# EAGLE board untitled - auto (EAGLE 7.2.0)
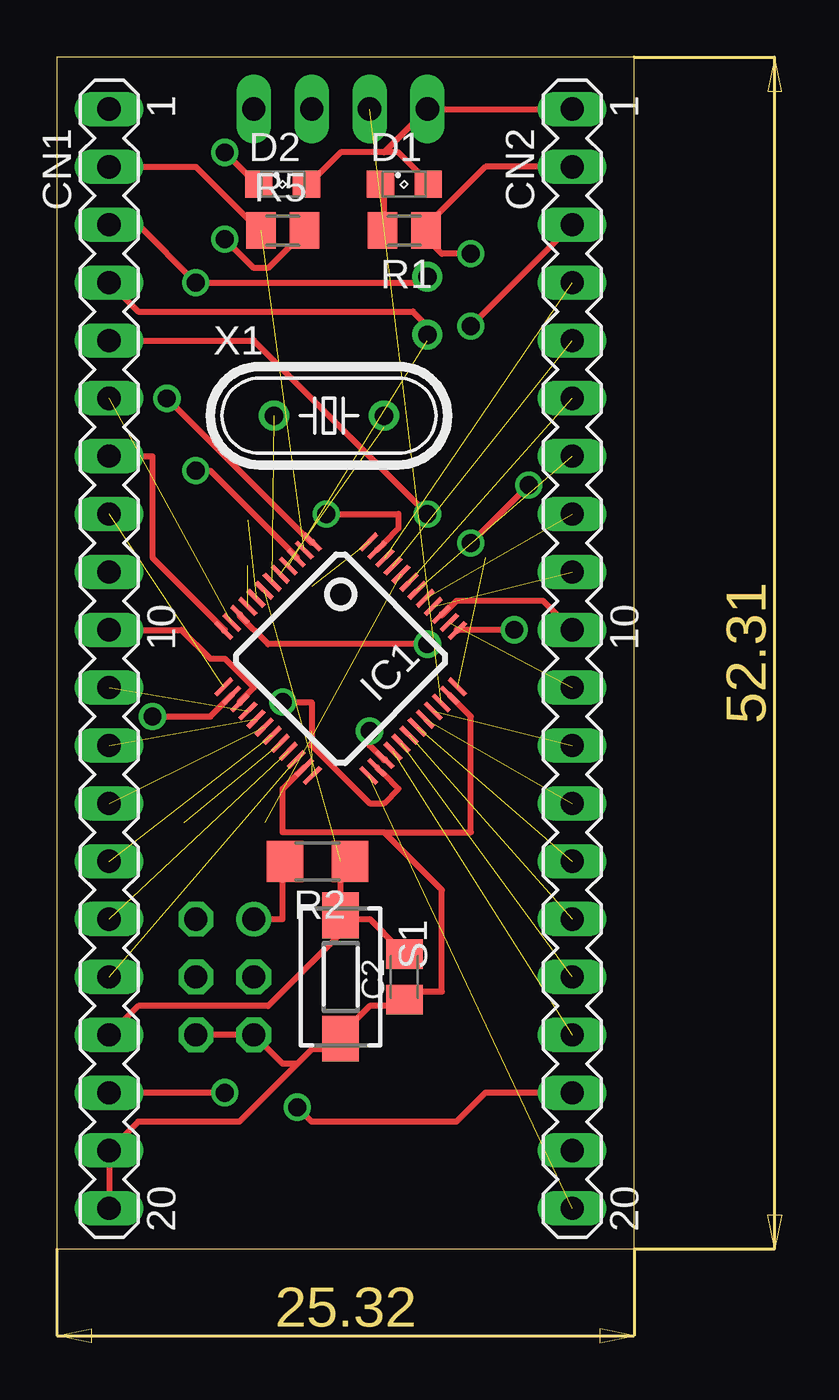
[diagram p0: board, top side]
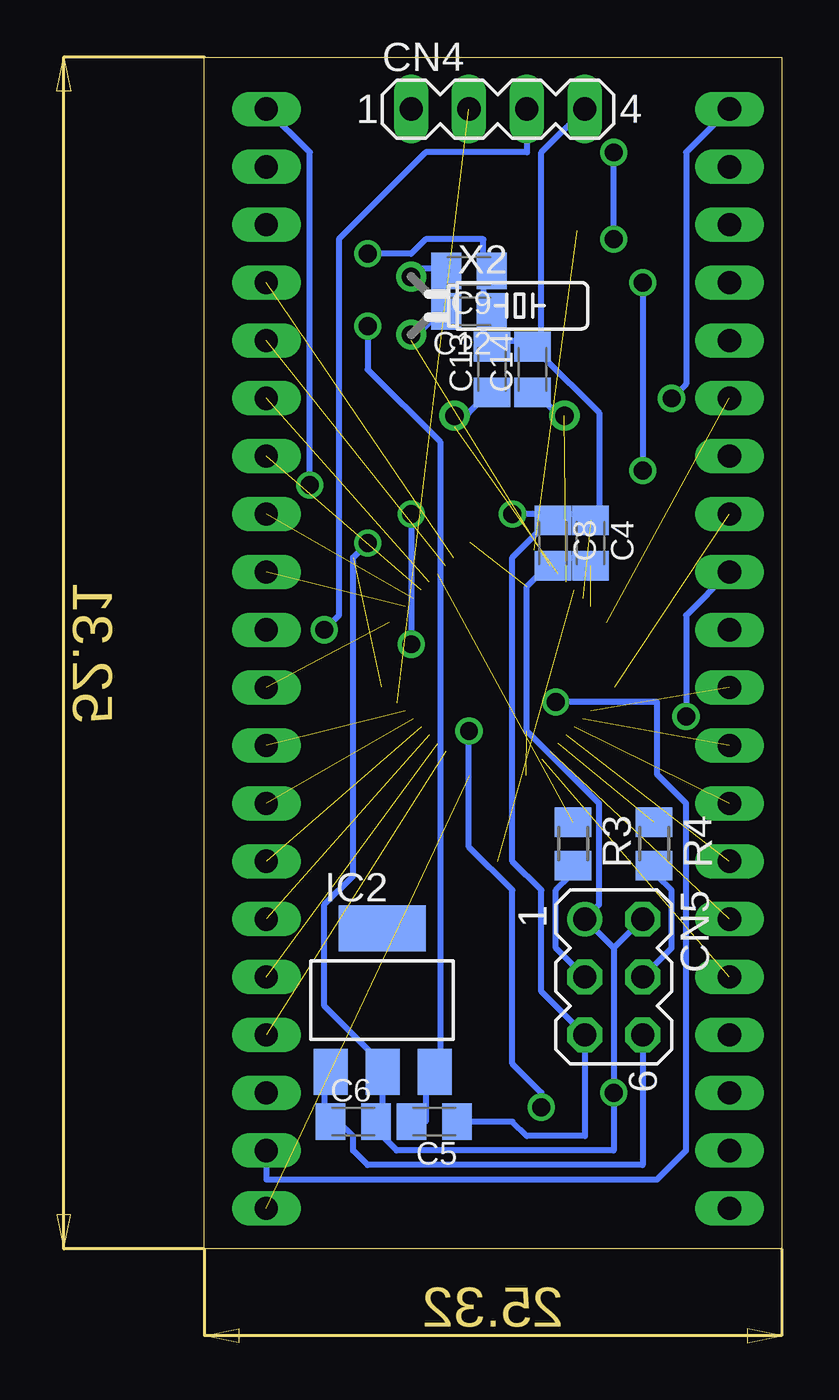
[diagram p1: board, bottom side, seen from below]

Size 25.32 x 52.31 mm. Coordinates in mm from the lower left corner, seen from the top.
Outline: 0,0 25.32,0 25.32,52.31 0,52.31 0,0
Copper layers (1*16): Top 0.035mm / dielectric 1.5mm / Bottom 0.035mm
Design rules "default *": minimum track width 10mil, minimum drill 31mil, track to track 8mil, track to pad 8mil, pad to pad 8mil, via to via 8mil, smd to smd 8mil, copper to edge 40mil, drill to drill 8mil, minimum pad ring 10mil, minimum via ring 8mil, stop-mask expansion 4mil, vias tented up to drill 0mil, thermal gap 10mil

## Footprints (pad centres in the part's own frame; a part is rotated, then mirrored left to right if it is on the bottom)
C0805K = smd 1.3 x 1.6: 1 -1,0; 2 1,0
MA20-1L = drill 1.016 long: 1 24.13,0; 2 21.59,0; 3 19.05,0; 4 16.51,0; 5 13.97,0; 6 11.43,0; 7 8.89,0; 8 6.35,0; 9 3.81,0; 10 1.27,0; 11 -1.27,0; 12 -3.81,0; 13 -6.35,0; 14 -8.89,0; 15 -11.43,0; 16 -13.97,0; 17 -16.51,0; 18 -19.05,0; 19 -21.59,0; 20 -24.13,0
MA04-1 = drill 1.016 long: 1 -3.81,0; 2 -1.27,0; 3 1.27,0; 4 3.81,0
MA03-2 = drill 1.016: 1 -2.54,-1.27 | drill 1.016 octagon: 2 -2.54,1.27; 3 0,-1.27; 4 0,1.27; 5 2.54,-1.27; 6 2.54,1.27
SML0805 = smd 1.2 x 1.2: A 1.05,0; C -1.05,0
TQFP48 = smd 0.2 x 1: 1 -2.75,-4.5; 2 -2.25,-4.5; 3 -1.75,-4.5; 4 -1.25,-4.5; 5 -0.75,-4.5; 6 -0.25,-4.5; 7 0.25,-4.5; 8 0.75,-4.5; 9 1.25,-4.5; 10 1.75,-4.5; 11 2.25,-4.5; 12 2.75,-4.5; 25 2.75,4.5; 26 2.25,4.5; 27 1.75,4.5; 28 1.25,4.5; 29 0.75,4.5; 30 0.25,4.5; 31 -0.25,4.5; 32 -0.75,4.5; 33 -1.25,4.5; 34 -1.75,4.5; 35 -2.25,4.5; 36 -2.75,4.5 | smd 1 x 0.2: 13 4.5,-2.75; 14 4.5,-2.25; 15 4.5,-1.75; 16 4.5,-1.25; 17 4.5,-0.75; 18 4.5,-0.25; 19 4.5,0.25; 20 4.5,0.75; 21 4.5,1.25; 22 4.5,1.75; 23 4.5,2.25; 24 4.5,2.75; 37 -4.5,2.75; 38 -4.5,2.25; 39 -4.5,1.75; 40 -4.5,1.25; 41 -4.5,0.75; 42 -4.5,0.25; 43 -4.5,-0.25; 44 -4.5,-0.75; 45 -4.5,-1.25; 46 -4.5,-1.75; 47 -4.5,-2.25; 48 -4.5,-2.75
SOT223 = smd 1.499 x 2.007: 1 -2.261,-3.15; 2 0.025,-3.15; 3 2.311,-3.15 | smd 3.81 x 2.007: 4 0,3.15
M0805 = smd 1.3 x 1.6: 1 -0.95,0; 2 0.95,0
R1206 = smd 1.6 x 1.803: 1 -1.422,0; 2 1.422,0
DTSM-3 = smd 2 x 1.6: 1 -2.7,0; 2 2.7,0
HC49/S = drill 0.813: 1 -2.413,0; 2 2.413,0
TC26H = drill 0.813: 1 -1.27,0; 2 1.27,0

## Placement (x,y rotation side)
C2  100n  [C0805K]  15.24,11.94 90 top
C4  100n  [C0805K]  8.38,30.99 270 bottom
C5  10u  [C0805K]  15.24,5.59 180 bottom
C6  10u  [C0805K]  18.8,5.59 0 bottom
C8  100n  [C0805K]  10.03,30.99 270 bottom
C9  100p  [C0805K]  13.72,42.93 180 bottom
C12  100p  [C0805K]  13.72,41.15 180 bottom
C13  12p  [C0805K]  12.7,38.61 90 bottom
C14  12p  [C0805K]  10.92,38.61 90 bottom
CN1  [MA20-1L]  2.29,25.91 90 top
CN2  [MA20-1L]  22.61,25.91 90 top
CN4  [MA04-1]  12.45,50.04 0 bottom
CN5  [MA03-2]  7.37,11.94 270 bottom
D1  red  [SML0805]  15.24,46.74 0 top
D2  blue  [SML0805]  9.91,46.74 0 top
IC1  STM32F10XCXT6  [TQFP48]  12.45,25.91 225 top
IC2  REG1117  [SOT223]  17.53,10.92 0 bottom
R1  510  [M0805]  15.24,44.7 180 top
R2  10k  [R1206]  11.43,17.02 180 top
R3  100k  [M0805]  9.14,17.78 270 bottom
R4  100k  [M0805]  5.59,17.78 270 bottom
R5  510  [M0805]  9.91,44.7 0 top
S1  DTSM-3  [DTSM-3]  12.45,11.94 270 top
X1  8M  [HC49/S]  11.94,36.58 0 top
X2  32k768  [TC26H]  16.26,41.4 270 bottom

## Library data of the parts
C2 C4-C6 C8 C9 C12-C14 R1-R5 = resistor
CN1 CN2 CN4 CN5 = con-lstb; OC_FARNELL: unknown; OC_NEWARK: unknown
D1 D2 = led
IC1 = stm32
IC2 = burr-brown; MPN: REG1117; OC_FARNELL: 1097566; OC_NEWARK: 14P6981
S1 = switch-tact
X1 = crystal; OC_FARNELL: 1667008; OC_NEWARK: unknown
X2 = crystal; OC_FARNELL: unknown; OC_NEWARK: unknown

## Nets
3VB: CN1.1 IC1.1
+3V3: C4.2 C6.2 C8.2 CN1.18 CN2.1 CN4.1 CN5.1 CN5.2 D1.A D2.A IC1.9 IC1.24 IC1.36 IC1.48 IC2.2 R2.2
+5V: C5.2 CN2.3 IC2.3
A0: CN1.5 IC1.10
A1: CN1.6 IC1.11
A2: CN1.7 IC1.12
A3: CN1.8 IC1.13
A4: CN1.9 IC1.14
A5: CN1.10 IC1.15
A6: CN1.11 IC1.16
A7: CN1.12 IC1.17
A8: CN2.16 IC1.29
A9: CN2.15 IC1.30
A10: CN2.14 IC1.31
A11: CN2.13 IC1.32
A12: CN2.12 IC1.33
A15: CN2.11 IC1.38
B0: CN1.13 IC1.18
B1: CN1.14 IC1.19
B3: CN2.10 IC1.39
B4: CN2.9 IC1.40
B5: CN2.8 IC1.41
B6: CN2.7 IC1.42
B7: CN2.6 IC1.43
B8: CN2.5 IC1.45
B9: CN2.4 IC1.46
B10: CN1.15 IC1.21
B11: CN1.16 IC1.22
B12: CN2.20 IC1.25
B13: CN2.19 IC1.26
B14: CN2.18 IC1.27
B15: CN2.17 IC1.28
BOOT0: CN5.3 R3.2
BOOT1: CN5.4 R4.2
C13: CN1.2 IC1.2 R5.1
C14: C9.2 CN1.3 IC1.3 X2.1
C15: C12.2 CN1.4 IC1.4 X2.2
DCLK: CN4.3 IC1.37
DIO: CN4.2 IC1.34
GND: C2.1 C4.1 C5.1 C6.1 C8.1 C9.1 C12.1 C13.2 C14.2 CN1.19 CN1.20 CN2.2 CN4.4 CN5.5 CN5.6 IC1.8 IC1.23 IC1.35 IC1.47 IC2.1 R1.1 S1.2
N$1: C13.1 IC1.5 X1.2
N$2: C14.1 IC1.6 X1.1
N$3: IC1.44 R3.1
N$4: IC1.20 R4.1
N$5: D1.C R1.2
N$6: D2.C R5.2
R: C2.2 CN1.17 IC1.7 R2.1 S1.1

## Tracks (layer width: path | path; a pad name or v marks a point on that pad's centre or on a via)
3VB  (via drill 0.79)
  Top 0.254: v4.83,37.34 11.18,30.99 IC1.1
  Bottom 0.254: v4.83,37.34 4.19,37.97 4.19,48.13 CN1.1
+3V3  (via drill 0.79)  (4 unrouted)
  Top 0.254: CN5.1 9.91,14.48 9.91,17.02 R2.2 | 14.35,48.13 14.99,48.13 16.26,46.86 D1.A | 14.35,48.13 12.45,48.13 11.18,46.86 D2.A | 14.35,48.13 CN4.1 CN2.1 | v7.37,6.86 CN1.18 | v18.16,30.99 v20.7,33.53
  Bottom 0.254: C4.2 8.64,30.35 9.91,30.35 C8.2 10.54,29.72 11.18,29.08 11.18,22.73 8,19.56 8,15.11 CN5.1 7.37,13.21 | 17.53,5.59 17.53,7.49 IC2.2 17.53,8.13 20.07,10.67 20.07,15.11 18.8,16.38 18.8,30.35 v18.16,30.99 | 17.53,5.59 17.53,4.95 16.89,4.32 7.37,4.32 v7.37,6.86 7.37,13.21 | CN5.2 7.37,13.21 | 17.53,5.59 C6.2 | CN2.1 20.7,48.13 v20.7,33.53
+5V  (via drill 0.79)
  Top 0.254: CN2.3 v18.16,40.51
  Bottom 0.254: C5.2 15.62,5.59 15.62,7.49 IC2.3 14.99,8.13 14.99,35.43 18.16,38.61 v18.16,40.51
A0  (via drill 0.79)
  Top 0.254: v16.26,26.54 9.27,26.54 8,27.81 IC1.10 | v16.26,32.26 8.64,39.88 CN1.5
  Bottom 0.254: v16.26,32.26 v16.26,26.54
A1  (1 unrouted)
A2
  Top 0.254: CN1.7 4.19,34.8 4.19,30.35 7.37,27.18 IC1.12
A3  (1 unrouted)
A4  (via drill 0.79)
  Top 0.254: v4.19,23.37 6.73,23.37 7.37,24 IC1.14
  Bottom 0.254: v4.19,23.37 4.19,27.81 CN1.9
A5
  Top 0.254: CN1.10 5.46,27.18 6.73,25.91 7.37,25.91 8.64,24.64 8,24 IC1.15
A6  (1 unrouted)
A7  (1 unrouted)
A8  (1 unrouted)
A9  (1 unrouted)
A10  (1 unrouted)
A11  (1 unrouted)
A12  (1 unrouted)
A15  (1 unrouted)
B0  (1 unrouted)
B1  (1 unrouted)
B3
  Top 0.254: CN2.10 21.34,28.45 17.53,28.45 16.89,27.81 IC1.39
B4  (1 unrouted)
B5  (1 unrouted)
B6  (1 unrouted)
B7  (1 unrouted)
B8  (1 unrouted)
B9  (1 unrouted)
B10  (1 unrouted)
B11  (1 unrouted)
B12  (1 unrouted)
B13  (via drill 0.79)
  Top 0.254: v9.91,24 11.18,24 11.18,22.1 13.72,19.56 14.35,19.56 14.99,20.19 14.35,20.83 IC1.26
  Bottom 0.254: v9.91,24 5.46,24 5.46,20.83 4.19,19.56 4.19,4.32 5.46,3.05 22.61,3.05 CN2.19
B14  (via drill 0.79)
  Top 0.254: v13.72,22.73 13.72,22.1 14.35,21.46 IC1.27 | v10.54,6.22 11.18,5.59 17.53,5.59 18.8,6.86 CN2.18
  Bottom 0.254: v13.72,22.73 13.72,17.65 11.81,15.75 11.81,8.13 10.54,6.86 v10.54,6.22
B15  (1 unrouted)
BOOT0
  Bottom 0.254: CN5.3 9.91,13.21 9.91,15.75 9.27,16.38 R3.2
BOOT1
  Bottom 0.254: CN5.4 4.83,13.21 4.83,15.75 5.46,16.38 R4.2
C13  (1 unrouted)
  Top 0.254: CN1.2 6.1,47.5 8.64,44.96 R5.1
C14  (via drill 0.79)
  Top 0.254: v6.1,34.16 6.73,34.16 10.54,30.35 IC1.3 | CN1.3 3.56,44.96 v6.1,42.42 16.26,42.42 X2.1
  Bottom 0.254: C9.2 14.99,43.05 16.26,43.05 X2.1 | v6.1,42.42 v6.1,34.16
C15  (1 unrouted)
  Top 0.254: CN1.4 3.56,41.15 15.62,41.15 16.26,40.51 X2.2
  Bottom 0.254: C12.2 14.99,41.15 16.26,39.88 X2.2
DCLK  (via drill 0.79)
  Top 0.254: v20.07,27.18 17.53,27.18 IC1.37
  Bottom 0.254: v20.07,27.18 19.43,27.81 19.43,44.32 15.62,48.13 11.18,48.13 CN4.3
DIO  (1 unrouted)
GND  (via drill 0.79)  (1 unrouted)
  Top 0.254: CN2.2 18.8,47.5 16.26,44.96 R1.1 16.26,44.32 16.89,43.69 v18.16,43.69 | v11.81,32.26 14.99,32.26 14.99,31.62 14.35,30.99 IC1.47 | CN1.20 CN1.19 3.56,5.59 8,5.59 10.54,8.13 | 14.35,18.29 9.91,18.29 9.91,20.19 10.54,20.83 IC1.23 | 14.35,18.29 16.89,15.75 16.89,11.3 15.62,11.3 C2.1 14.99,10.67 13.72,10.67 12.45,9.4 S1.2 12.45,8.76 11.18,8.76 10.54,8.13 | 14.35,18.29 18.16,18.29 18.16,23.37 17.53,24 IC1.35 | 10.54,8.13 9.91,8.13 CN5.5 CN5.6
  Bottom 0.254: v11.81,32.26 10.54,32.26 C8.1 | C8.1 9.91,32.26 8.64,32.26 C4.1 8,32.26 8,36.7 10.54,39.24 C14.2 | C14.2 11.18,39.88 12.45,39.88 C13.2 13.08,39.88 13.08,41.15 | 13.08,41.15 13.08,42.42 C9.1 13.08,43.05 13.08,44.32 15.62,44.32 16.26,43.69 v18.16,43.69 | 13.08,41.15 C12.1 | CN4.4 10.54,48.13 10.54,39.88 C14.2 | IC2.1 20.07,7.49 20.07,5.59 C6.1 19.43,5.59 18.8,4.95 18.8,4.32 18.16,3.68 6.1,3.68 CN5.6 | C5.1 11.81,5.59 11.18,4.95 8.64,4.95 CN5.5 10.54,11.3 10.54,15.75 11.81,17.02 11.81,30.35 10.54,31.62 C8.1
N$1  (1 unrouted)
  Bottom 0.254: C13.1 13.08,37.34 14.35,36.07 X1.2
N$2  (1 unrouted)
  Bottom 0.254: C14.1 10.54,37.34 9.91,36.7 X1.1
N$3  (1 unrouted)
N$4  (1 unrouted)
N$5
  Top 0.254: D1.C 14.35,46.23 14.35,44.96 R1.2
N$6  (via drill 0.79)
  Top 0.254: v7.37,48.13 8.64,46.86 D2.C | v7.37,44.32 8.64,43.05 9.27,43.05 10.54,44.32 R5.2
  Bottom 0.254: v7.37,44.32 v7.37,48.13
R  (1 unrouted)
  Top 0.254: 13.08,14.48 12.45,14.48 S1.1 | 13.08,14.48 13.72,14.48 14.99,13.21 C2.2 | S1.1 12.45,17.02 R2.1 | CN1.17 3.56,10.67 9.27,10.67 13.08,14.48 | 13.08,14.48 S1.1